# Altium PCB old_PCB.PcbDoc
Units mm, origin at the board's own origin, x right, y up, seen from the top; angles counter-clockwise.
Board outline 100 x 100 mm, 2 copper layers (Top Layer, Bottom Layer); 44 components, 56 nets, 179 pads, 1 vias.
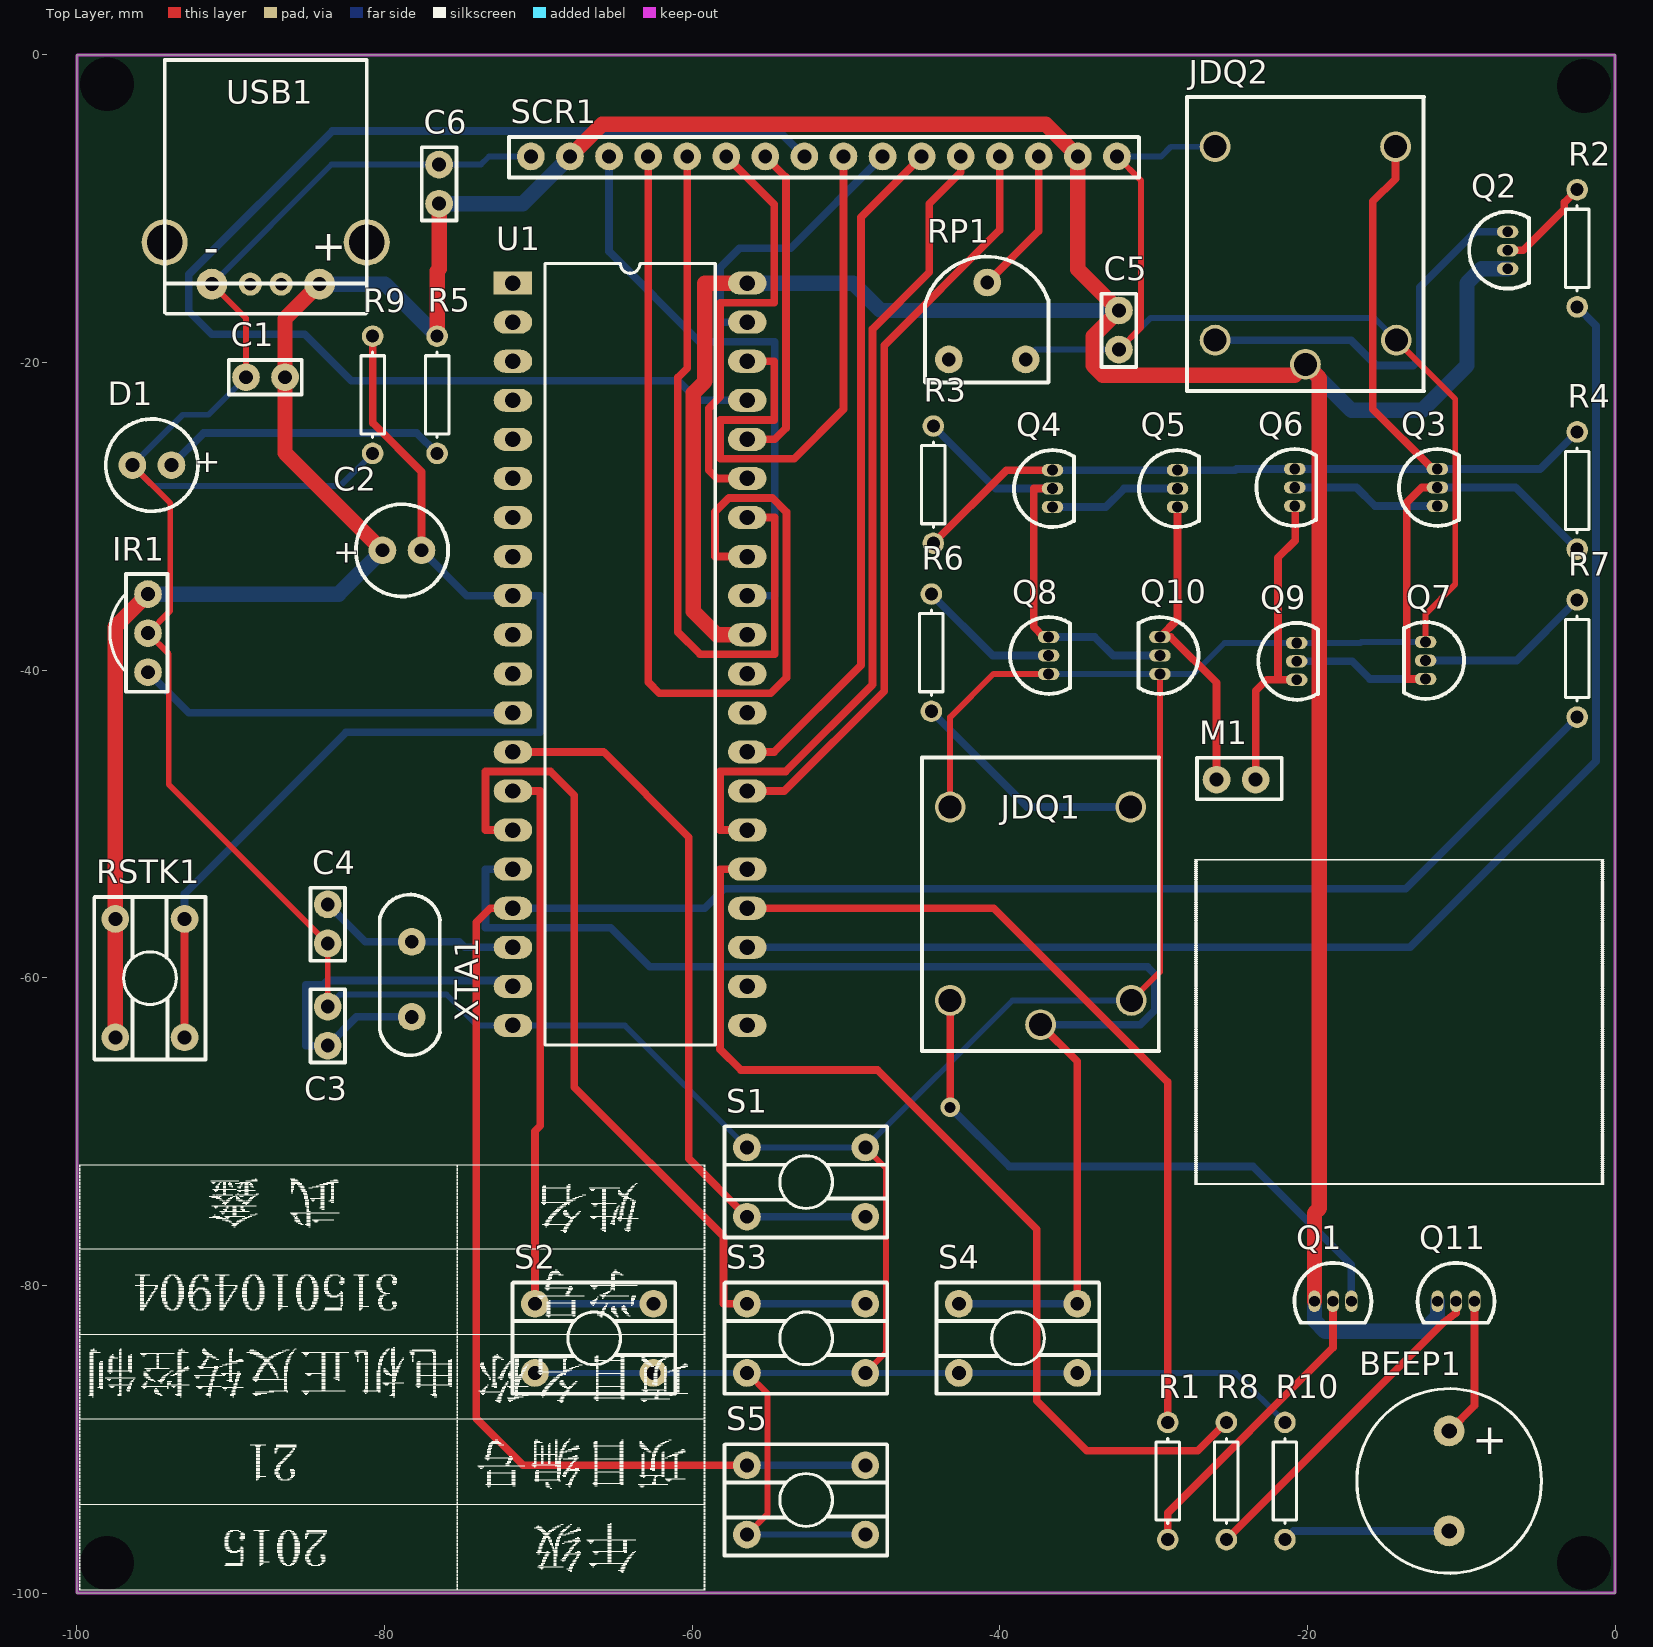
[diagram p0: Top Layer view]
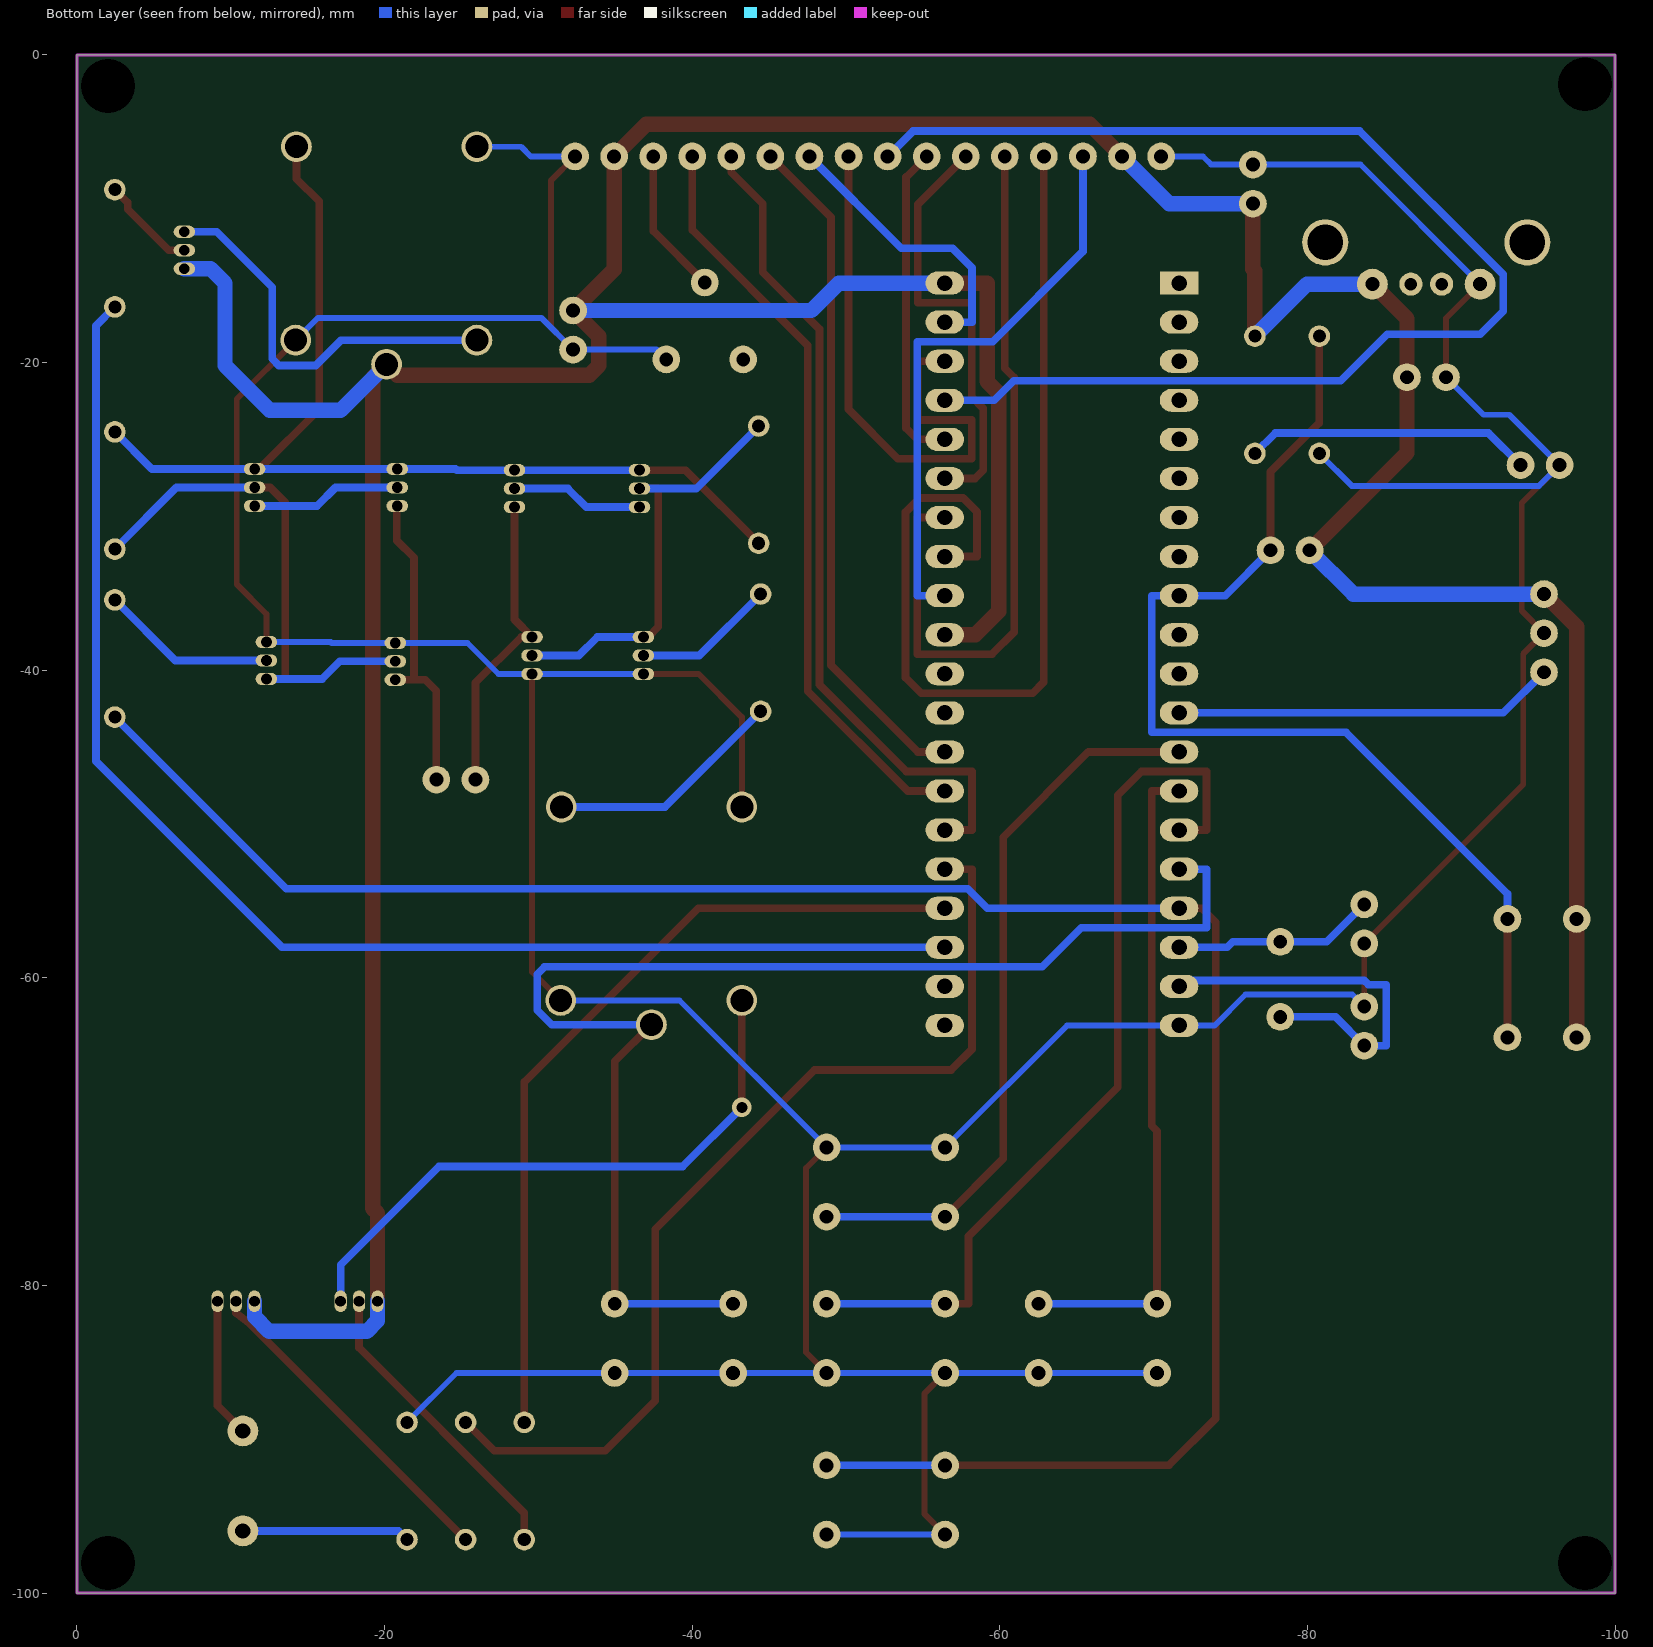
[diagram p1: Bottom Layer view, seen from below]

## Layer stack, top to bottom
Top Solder: solder mask 0.0102, Solder Resist, Dk 3.5
Top Layer: signal copper 0.0356
Dielectric 1: dielectric 0.32, FR-4, Dk 4.8
Bottom Layer: signal copper 0.0356
Bottom Solder: solder mask 0.0102, Solder Resist, Dk 3.5

## Board outline
-100,-100 0,-100 0,0 -100,0

## Design rules (kind name [scope] priority, off if disabled: settings)
Clearance [All] p1: gap=0.254
PolygonConnect [All] p1: connectstyle=Relief reliefconductorwidth=0.254 reliefentries=4 polygonreliefangle="90 Angle" airgapwidth=0.254
RoutingVias [All] p1: holewidth=0.711 width=1.27 viastyle="Through Hole" minholewidth=0.711 minwidth=1.27 maxholewidth=0.711 maxwidth=1.27
SolderMaskExpansion [All] p1: expansion=0.102
Width Width_gnd [InNet('GND')] p1: maxlimit=0.381 minlimit=0.381 preferedwidth=0.381
Width Width_vcc [InNet('VCC')] p2: maxlimit=1 minlimit=1 preferedwidth=1
Width [All] p3: maxlimit=0.5 minlimit=0.5 preferedwidth=0.5
30 further rules are at their usual default settings.

## Components (designator, comment, footprint, x,y, rotation, side; value= is the part's Value field where it differs from the comment)
BEEP1 "BEEP" BEEP -10.795,-92.71 r0 top
C1 "104" CAP -87.757,-20.955 r0 top
C2 "10UF" CAP-ELEC -78.867,-32.258 r0 top
C3 "30pF" CAP -83.693,-63.119 r270 top
C4 "30pF" CAP -83.693,-56.515 r90 top
C5 "104" CAP -32.258,-17.907 r90 top
C6 "104" CAP -76.454,-8.382 r270 top
D1 "LED" LED -95.123,-26.62 r180 top
IR1 "1x3" RAY -95.377,-40.132 r90 top
JDQ1 "3-2" RELAY -45.054,-62.865 r90 top
JDQ2 "3-2" RELAY -27.829,-19.939 r90 top
M1 "MOTOR" MOTOR -27.056,-48.265 r0 top
Q1 "9012" PINS-3 -18.345,-81.026 r0 top
Q2 "9012" PINS-3 -6.985,-12.7 r90 top
Q3 "9013" PINS-3 -11.557,-28.124 r90 top
Q4 "9013" PINS-3 -36.576,-28.194 r90 top
Q5 "9013" PINS-3 -28.448,-28.194 r90 top
Q6 "9013" PINS-3 -20.828,-28.124 r90 top
Q7 "9013" PINS-3 -12.319,-39.37 r270 top
Q8 "9013" PINS-3 -36.83,-39.046 r90 top
Q9 "9012" PINS-3 -20.701,-39.427 r90 top
Q10 "9012" PINS-3 -29.591,-39.046 r270 top
Q11 "9013" PINS-3 -10.344,-81.026 r0 top
R1 "10K" RES -29.718,-90.17 r270 top
R2 "10K" RES -1.829,-15.113 r90 top
R3 "1K" RES -43.688,-30.48 r90 top
R4 "1K" RES -3.099,-25.781 r270 top
R5 "1K" RES -77.216,-19.558 r270 top
R6 "1K" RES -43.815,-41.402 r90 top
R7 "1K" RES -1.829,-41.783 r90 top
R8 "100" RES -25.908,-90.17 r270 top
R9 "10K" RES -80.137,-24.638 r90 top
R10 "100" RES -20.828,-95.25 r90 top
RP1 "5K" RES-ADJ -40.767,-17.272 r0 top
RSTK1 "按键" KEY-4 -95.25,-60.071 r270 top
S1 "按键" KEY-4 -52.641,-73.279 r180 top
S2 "按键" KEY-4 -66.421,-83.439 r180 top
S3 "按键" KEY-4 -52.641,-83.439 r180 top
S4 "按键" KEY-4 -38.862,-83.439 r180 top
S5 "按键" KEY-4 -52.641,-93.944 r180 top
SCR1 "LCD1602" LCD -70.485,-6.604 r180 top
U1 "ST89C52" STC89C52 -63.754,-38.735 r0 top
USB1 "1x4" USB -94.315,-16.573 r0 top
XTA1 "12MHz" CRYSTAL -78.232,-62.538 r90 top

## Footprints (in the part's own frame and the unit in brackets; to place one, negate y for a bottom-side part, rotate by r counter-clockwise, add the part's x,y. Pads: shape width x height; smd on the part's side, far side on the other; paste and mask are expansions set on the pad)
BEEP [mm]
  round 2 hole 1: 1(0,3.25) 2(0,-3.25)
  silkscreen extent -6,-6 6,6
CAP [mm]
  round 1.8 hole 0.9: 1(-1.25,0) 2(1.29,0)
  silkscreen extent -2.37,-1.13 2.38,1.13
CAP-ELEC [mm]
  round 1.8 hole 0.9: 1(-1.27,0.05) 2(1.27,0.05)
  silkscreen extent -3,-2.95 3,3.05
CRYSTAL [mm]
  round 1.8 hole 0.9: 1(0,0) 2(4.88,0)
  silkscreen extent -2.5,-1.84 7.95,2.07
KEY-4 [mm]
  round 1.8 hole 0.9: 1(-3.9,-2.25) 1(3.8,-2.25) 2(-3.9,2.25) 2(3.8,2.25)
  silkscreen extent -5.33,-3.62 5.25,3.6
LCD [mm]
  round 1.8 hole 0.9: 1(-38.1,0) 2(-35.56,0) 3(-33.02,0) 4(-30.48,0) 5(-27.94,0) 6(-25.4,0) 7(-22.86,0) 8(-20.32,0) 9(-17.78,0) 10(-15.24,0) 11(-12.7,0) 12(-10.16,0) 13(-7.62,0) 14(-5.08,0) 15(-2.54,0) 16(0,0)
  silkscreen extent -39.52,-1.27 1.42,1.38
LED [mm]
  round 1.8 hole 0.9: 1(-1.27,0.05) 2(1.27,0.05)
  silkscreen extent -3,-2.95 3,3.05
MOTOR [mm]
  round 1.8 hole 0.9: IN(1.148,1.148) OUT(3.688,1.148)
  silkscreen extent -0.13,-0.13 5.39,2.57
PINS-3 [mm]
  oval 0.8x1.4 hole 0.7: 1(-1.2,0) 2(0,0) 3(1.2,0)
  silkscreen extent -2.5,-1.4 2.5,2.5
RAY [mm]
  round 1.8 hole 0.9: 1(0,0) 2(2.54,0) 3(5.08,0)
  silkscreen extent -1.27,-1.27 6.37,2.48
RELAY [mm]
  round 2 hole 1.5: 1(13.97,-13.558) 2(13.97,-1.825) 3(1.397,-1.825) 4(-0.18,-7.7) 5(1.397,-13.605)
  silkscreen extent -1.91,-15.4 17.19,0
RES [mm]
  round 1.4 hole 0.85: 1(-1.27,0.635) 2(6.35,0.635)
  silkscreen extent -0.23,-0.13 5.31,1.4
RES-ADJ [mm]
  round 1.8 hole 0.9: 1(-2.55,-2.525) 2(-0.05,2.475) 3(2.45,-2.525)
  silkscreen extent -4.1,-4.02 3.93,4.15
STC89C52 [mm]
  rect 2.5x1.5 hole 1: 1(-7.9,23.9)
  oval 2.5x1.5 hole 1: 2(-7.9,21.36) 3(-7.9,18.82) 4(-7.9,16.28) 5(-7.9,13.74) 6(-7.9,11.2) 7(-7.9,8.66) 8(-7.9,6.12) 9(-7.9,3.58) 10(-7.9,1.04) 11(-7.9,-1.5) 12(-7.9,-4.04) 13(-7.9,-6.58) 14(-7.9,-9.12) 15(-7.9,-11.66) 16(-7.9,-14.2) 17(-7.9,-16.74) 18(-7.9,-19.28) 19(-7.9,-21.82) 20(-7.9,-24.36) 21(7.34,-24.36) 22(7.34,-21.82) 23(7.34,-19.28) 24(7.34,-16.74) 25(7.34,-14.2) 26(7.34,-11.66) 27(7.34,-9.12) 28(7.34,-6.58) 29(7.34,-4.04) 30(7.34,-1.5) 31(7.34,1.04) 32(7.34,3.58) 33(7.34,6.12) 34(7.34,8.66) 35(7.34,11.2) 36(7.34,13.74) 37(7.34,16.28) 38(7.34,18.82) 39(7.34,21.36) 40(7.34,23.9)
  silkscreen extent -5.82,-25.63 5.26,25.17
USB [mm]
  round 2 hole 0.9: 1(10.092,1.671) 4(3.092,1.671)
  round 1.5 hole 0.8: 2(5.592,1.671) 3(7.592,1.671)
  round 3 hole 2.3: 5(13.162,4.381) 6(0.022,4.381)
  silkscreen extent 0.02,-0.25 13.16,16.25

## Part data
BEEP1: library part 蜂鸣器
C1 C3 C4 C5 C6: library part 瓷片电容
C2: library part 电解电容
JDQ1 JDQ2: library part RELAY
Q1 Q2 Q9 Q10: library part PNP
Q3 Q4 Q5 Q6 Q7 Q8 Q11: library part NPN
R1 R2 R3 R4 R5 R6 R7 R8 R9 R10: library part 电阻
RP1: library part 可调电阻
SCR1: library part LCD
U1: library part STC89C52
XTA1: library part 晶振

## Free pads (board coordinates)
  round 1.524 hole 3.5: 0(-98.044,-98.044) 0(-98.044,-1.905) 0(-2.032,-98.044) 0(-2.032,-2.032)

## Via types
v1: diameter 1.27, hole 0.711, Top Layer to Bottom Layer, 1 vias

## Nets (pads, with @x,y where several pads share a name; then routed paths per layer and width w, separated by ;. In a path a pad name is that pad's centre, name@x,y a point inside that pad or via, vN(x,y) a via of type N, cw(c..) or ccw(c..) an arc to the next point about the centre after c; other vN are vias at no path point)
DIR: JDQ1.1 R6.1 | length 15.5
  Bottom Layer w0.5: R6.1 -38.227,-48.895 JDQ1.1
EGY: JDQ2.1 Q3.3 Q4.3 Q5.3 Q6.3 R3.1 R4.1 | length 68.3
  Top Layer w0.5: R3.1 -39.567,-26.994 Q4.3 ; JDQ2.1 -14.271,-8.048 -15.748,-9.525 -15.748,-23.038 -11.862,-26.924 Q3.3
  Bottom Layer w0.5: Q4.3 Q5.3 -24.689,-26.994 -24.619,-26.924 Q6.3 Q3.3 -4.877,-26.924 R4.1
GND: C1.1 C3.1 C4.1 C5.1 C6.1 D1.2 IR1.2 JDQ1.2 JDQ1.5 JDQ2.2 JDQ2.5 Q7.1 Q8.1 Q9.3 Q10.3 R9.1 R10.2 RP1.3 S1.1 S2.2 S3.2 S4.2 S5.2 SCR1.1 SCR1.16 U1.20 USB1.4 | length 374.5
  Top Layer w0.381: D1.2 -93.929,-29.134 -93.929,-36.144 IR1.2 -94.031,-38.938 -94.031,-47.427 C4.1 C3.1 ; USB1.4 -89.007,-17.118 C1.1 ; S5.2@-56.441,-96.194 -55.093,-94.845 -55.093,-87.038 S3.2@-56.441,-85.689 ; S3.2@-48.741,-85.689 -47.397,-84.344 -47.397,-72.374 S1.1@-48.741,-71.029 ; JDQ1.2 -43.229,-43.053 -40.422,-40.246 Q8.1 ; SCR1.1 -30.81,-8.179 -30.81,-17.709 C5.1 ; JDQ1.5 -29.591,-59.61 Q10.3 ; JDQ2.5 -10.389,-22.377 -10.389,-34.417 -12.319,-36.347 Q7.1
  Bottom Layer w0.381: USB1.4 -83.453,-7.132 C6.1 -73.736,-7.132 -73.208,-6.604 SCR1.16 ; C1.1 -91.445,-23.393 -93.116,-23.393 D1.2 -95.047,-28.016 -82.88,-28.016 R9.1 ; C3.1 -82.911,-61.087 -75.972,-61.087 -73.964,-63.095 U1.20 -64.375,-63.095 -56.441,-71.029 -48.741,-71.029 -39.18,-61.468 JDQ1.5 ; S2.2@-70.221,-85.689 -62.521,-85.689 -56.441,-85.689 -48.741,-85.689 -42.662,-85.689 -34.962,-85.689 -24.674,-85.689 R10.2 ; S5.2@-56.441,-96.194 S5.2@-48.741,-96.194 ; RP1.3 -37.677,-19.157 C5.1 -30.195,-17.094 -15.672,-17.094 JDQ2.5 ; Q8.1 Q10.3 -27.407,-40.246 -25.388,-38.227 Q9.3 -16.561,-38.227 -16.504,-38.17 Q7.1 ; SCR1.1 -29.515,-6.604 -28.88,-5.969 JDQ2.2
NetBEEP1_1: BEEP1.1 Q11.3 | length 9.1
  Top Layer w0.5: BEEP1.1 -9.144,-87.809 Q11.3
NetBEEP1_2: BEEP1.2 R10.1 | length 10.9
  Bottom Layer w0.5: R10.1 -20.903,-95.96 BEEP1.2
NetD1_1: D1.1 R5.2 | length 18.7
  Bottom Layer w0.5: D1.1 -91.77,-24.587 -77.902,-24.587 R5.2
NetJDQ1_3: JDQ1.3 Q1.3 | length 39.6
  Top Layer w0.5: v1(-43.229,-68.428) JDQ1.3
  Bottom Layer w0.5: v1(-43.229,-68.428) -39.394,-72.263 -23.546,-72.263 -17.145,-78.664 Q1.3
NetJDQ2_3: JDQ2.3 Q2.3 | length 26
  Bottom Layer w0.5: JDQ2.3 -17.171,-18.542 -15.52,-20.193 -13.132,-20.193 -12.7,-19.761 -12.7,-15.113 -9.087,-11.5 Q2.3
NetM1_IN: M1.IN Q5.1 Q10.1 | length 20.1
  Top Layer w0.5: Q5.1 -28.448,-36.703 Q10.1 -28.88,-37.846 -25.908,-40.818 M1.IN
NetM1_OUT: M1.OUT Q6.1 Q9.1 | length 20.5
  Top Layer w0.5: M1.OUT -23.368,-41.338 -22.657,-40.627 -21.92,-40.627 ; Q6.1 -20.803,-29.324 -20.803,-31.572 -21.92,-32.69 -21.92,-40.627 ; Q9.1 -21.92,-40.627
NetQ1_2: Q1.2 R1.2 | length 19.9
  Top Layer w0.5: R1.2 -29.083,-94.793 -18.345,-84.055 Q1.2
NetQ2_2: Q2.2 R2.2 | length 6.4
  Top Layer w0.5: Q2.2 -5.969,-12.7 -3.302,-10.033 -3.302,-9.601 R2.2
NetQ3_2: Q3.2 Q7.3 Q9.2 R4.2 | length 34.7
  Top Layer w0.5: Q7.3 -13.553,-40.57 -13.553,-29.098 -12.579,-28.124 Q3.2
  Bottom Layer w0.5: Q9.2 -17.094,-39.427 -15.951,-40.57 Q7.3 ; Q3.2 -6.471,-28.124 R4.2
NetQ3_3: Q3.1 Q6.2 | length 9.8
  Bottom Layer w0.5: Q6.2 -16.815,-28.124 -15.615,-29.324 Q3.1
NetQ4_2: Q4.2 Q8.3 Q10.2 R3.2 | length 28.6
  Top Layer w0.5: Q8.3 -37.135,-37.846 -37.795,-37.186 -37.795,-28.194 Q4.2
  Bottom Layer w0.5: R3.2 -40.259,-28.194 Q4.2 ; Q8.3 -33.833,-37.846 -32.633,-39.046 Q10.2
NetQ4_3: Q4.1 Q5.2 | length 8.6
  Bottom Layer w0.5: Q4.1 -33.122,-29.394 -31.922,-28.194 Q5.2
NetQ7_2: Q7.2 R7.2 | length 11.5
  Bottom Layer w0.5: Q7.2 -6.401,-39.37 R7.2
NetQ8_2: Q8.2 R6.2 | length 9.3
  Bottom Layer w0.5: R6.2 -40.456,-39.046 Q8.2
NetQ11_2: Q11.2 R8.2 | length 21.7
  Top Layer w0.5: R8.2 -11.176,-82.423 -10.344,-81.788 Q11.2
NetRP1_2: RP1.2 SCR1.3 | length 9.6
  Top Layer w0.5: RP1.2 -37.465,-11.445 SCR1.3
P00: SCR1.7 U1.39 | length 18.9
  Bottom Layer w0.5: U1.39 -58.192,-17.375 -58.192,-13.843 -56.922,-12.573 -53.594,-12.573 SCR1.7
P01: SCR1.8 U1.38 | length 37.4
  Top Layer w0.5: U1.38 -54.66,-19.915 -54.66,-23.741 -58.168,-23.741 -58.168,-26.249 -53.376,-26.249 -50.165,-23.038 SCR1.8
P02: SCR1.9 U1.37 | length 85.7
  Bottom Layer w0.5: U1.37 -59.638,-22.455 -60.909,-21.184 -82.169,-21.184 -85.192,-18.161 -91.237,-18.161 -92.727,-16.671 -92.727,-14.279 -83.401,-4.953 -54.356,-4.953 SCR1.9
P03: SCR1.10 U1.36 | length 21
  Top Layer w0.5: U1.36 -54.636,-24.995 -53.906,-24.265 -53.906,-7.943 SCR1.10
P04: SCR1.11 U1.35 | length 28.2
  Top Layer w0.5: SCR1.11 -54.66,-9.729 -54.66,-16.104 -58.168,-16.104 -58.168,-22.233 -58.922,-22.987 -58.922,-27.003 -58.39,-27.535 U1.35
P05: SCR1.12 U1.34 | length 48.7
  Top Layer w0.5: SCR1.12 -60.325,-20.374 -60.93,-20.979 -60.93,-37.52 -59.487,-38.964 -54.636,-38.964 -54.636,-30.075 U1.34
P06: SCR1.13 U1.33 | length 65.1
  Top Layer w0.5: SCR1.13 -62.865,-40.767 -62.129,-41.504 -54.89,-41.504 -53.874,-40.488 -53.874,-29.718 -54.788,-28.804 -57.607,-28.804 -58.522,-29.718 -58.522,-32.615 U1.33
P07: SCR1.14 U1.32 | length 37.7
  Bottom Layer w0.5: SCR1.14 -65.405,-12.776 -59.538,-18.644 -54.636,-18.644 -54.636,-35.155 U1.32
P10: U1.1
P11: U1.2
P12: U1.3
P13: U1.4
P14: U1.5
P15: U1.6
P16: U1.7
P17: U1.8
P20: U1.21
P21: U1.22
P22: R2.1 U1.23 | length 90.2
  Bottom Layer w0.5: U1.23 -13.337,-58.015 -1.245,-45.923 -1.245,-17.602 R2.1
P23: R1.1 U1.24 | length 54.1
  Top Layer w0.5: U1.24 -40.385,-55.475 -29.083,-66.777 R1.1
P24: R8.1 U1.25 | length 64.5
  Top Layer w0.5: U1.25 -58.192,-52.935 -58.192,-64.643 -56.845,-65.989 -47.955,-65.989 -37.592,-76.352 -37.592,-87.503 -34.341,-90.754 -27.127,-90.754 R8.1
P25: SCR1.5 U1.26 | length 54.5
  Top Layer w0.5: U1.26 -58.192,-50.395 -58.192,-46.584 -53.924,-46.584 -48.273,-40.932 -48.273,-17.818 -44.595,-14.14 -44.595,-9.677 -42.545,-7.628 SCR1.5
P26: SCR1.4 U1.27 | length 49.5
  Top Layer w0.5: U1.27 -54.007,-47.855 -47.519,-41.367 -47.519,-18.893 -40.005,-11.379 SCR1.4
P27: SCR1.6 U1.28 | length 44.4
  Top Layer w0.5: U1.28 -54.661,-45.315 -49.027,-39.681 -49.027,-10.546 SCR1.6
P32: IR1.1 U1.12 | length 24.8
  Bottom Layer w0.5: IR1.1 -92.734,-42.775 U1.12
P33: S1.2 U1.13 | length 47.7
  Top Layer w0.5: U1.13 -65.761,-45.315 -60.224,-50.852 -60.224,-71.747 S1.2@-56.441,-75.529
  Bottom Layer w0.5: S1.2@-56.441,-75.529 S1.2@-48.741,-75.529
P34: S2.1 U1.14 | length 43
  Top Layer w0.5: U1.14 -69.876,-47.855 -69.876,-69.621 -70.221,-69.967 S2.1@-70.221,-81.189
  Bottom Layer w0.5: S2.1@-70.221,-81.189 S2.1@-62.521,-81.189
P35: S3.1 U1.15 | length 58.3
  Top Layer w0.5: U1.15 -73.432,-50.395 -73.432,-46.584 -69.215,-46.584 -67.666,-48.133 -67.666,-67.107 -57.963,-76.81 -57.963,-81.189 S3.1@-56.441,-81.189
  Bottom Layer w0.5: S3.1@-56.441,-81.189 S3.1@-48.741,-81.189
P36: JDQ1.4 S4.1 U1.16 | length 87.3
  Top Layer w0.5: JDQ1.4 -34.962,-65.437 S4.1@-34.962,-81.189
  Bottom Layer w0.5: U1.16 -73.432,-52.935 -73.432,-56.744 -65.304,-56.744 -62.764,-59.284 -30.404,-59.284 -29.921,-59.766 -29.921,-62.103 -30.863,-63.045 JDQ1.4 ; S4.1@-42.662,-81.189 S4.1@-34.962,-81.189
P37: R7.1 S5.1 U1.17 | length 135.9
  Top Layer w0.5: U1.17 -73.128,-55.475 -74.041,-56.388 -74.041,-88.646 -70.993,-91.694 S5.1@-56.441,-91.694
  Bottom Layer w0.5: U1.17 -59.184,-55.475 -57.912,-54.204 -13.615,-54.204 R7.1 ; S5.1@-56.441,-91.694 S5.1@-48.741,-91.694
RST: C2.2 R9.2 RSTK1.2 U1.9 | length 69.9
  Top Layer w0.5: RSTK1.2@-93,-63.871 RSTK1.2@-93,-56.171 ; R9.2 -80.772,-23.927 -77.597,-27.102 C2.2
  Bottom Layer w0.5: RSTK1.2@-93,-56.171 -93,-54.544 -82.499,-44.044 -69.876,-44.044 -69.876,-35.155 U1.9 -74.65,-35.155 C2.2
RXD: U1.10
TXD: U1.11
VCC: C1.2 C2.1 C5.2 C6.2 IR1.3 JDQ2.4 Q1.1 Q2.1 Q11.1 R5.1 RSTK1.1 SCR1.2 SCR1.15 U1.31 U1.40 USB1.1 | length 306.1
  Top Layer w1: RSTK1.1@-97.5,-63.871 -97.5,-56.171 -97.5,-37.175 IR1.3 ; USB1.1 -86.467,-17.146 C1.2 -86.467,-25.878 C2.1 ; R5.1 -76.581,-14.046 -76.454,-13.919 C6.2 ; SCR1.15 -65.862,-4.521 -37.008,-4.521 SCR1.2 -34.925,-13.95 C5.2 -33.935,-18.294 -33.935,-20.193 -33.3,-20.828 -20.838,-20.828 JDQ2.4 -19.228,-21.02 -19.228,-74.981 -19.545,-75.298 Q1.1 ; U1.31 -58.42,-37.695 -59.926,-36.189 -59.926,-21.983 -59.172,-21.229 -59.172,-14.835 U1.40
  Bottom Layer w1: IR1.3 -82.981,-35.052 C2.1 ; USB1.1 -79.967,-14.902 R5.1 ; C6.2 -71.013,-9.672 SCR1.15 ; U1.40 -49.53,-14.835 -47.748,-16.617 C5.2 ; JDQ2.4 -17.134,-23.114 -12.548,-23.114 -9.627,-20.193 -9.627,-14.84 -8.687,-13.9 Q2.1 ; Q1.1 -19.545,-82.284 -18.847,-82.982 -12.497,-82.982 -11.544,-82.029 Q11.1
XT1: C3.2 U1.19 XTA1.1 | length 25.4
  Bottom Layer w0.5: XTA1.1 -81.822,-62.538 C3.2 -85.116,-64.409 -85.116,-60.452 -83.973,-60.452 -83.693,-60.173 -72.544,-60.173 -72.162,-60.555 U1.19
XT2: C4.2 U1.18 XTA1.2 | length 13.2
  Bottom Layer w0.5: C4.2 -81.26,-57.658 XTA1.2 -75.133,-57.658 -74.776,-58.015 U1.18
pads on no net: RP1.1 U1.29 U1.30 USB1.2 USB1.3 USB1.5 USB1.6

## Keep-outs
Keep-Out Layer:
  the board outline again, w0.2

## Silkscreen, mask and mechanical layers (free items; w line width, h text height)
Top Overlay:
  drawing of 4536 lines, arcs and shapes, not listed

## Text inside footprints (layer, text, board x,y; h text height)
BEEP1: Top Overlay "+" at -9.296,-90.983 h2
C2: Top Overlay "+" at -83.342,-33.008 h1.5
D1: Top Overlay "+" at -90.648,-25.87 h1.5 r180
USB1: Top Overlay "-" at -91.748,-13.502 h2; Top Overlay "+" at -84.773,-13.377 h2